# Altium PCB Timer.PcbDoc
Units mm, origin at the board's own origin, x right, y up, seen from the top; angles counter-clockwise.
Board outline 55 x 55 mm, 2 copper layers (Top Layer, Bottom Layer), stack 1.3 mm thick; 34 components, 43 nets, 113 pads, 22 vias.
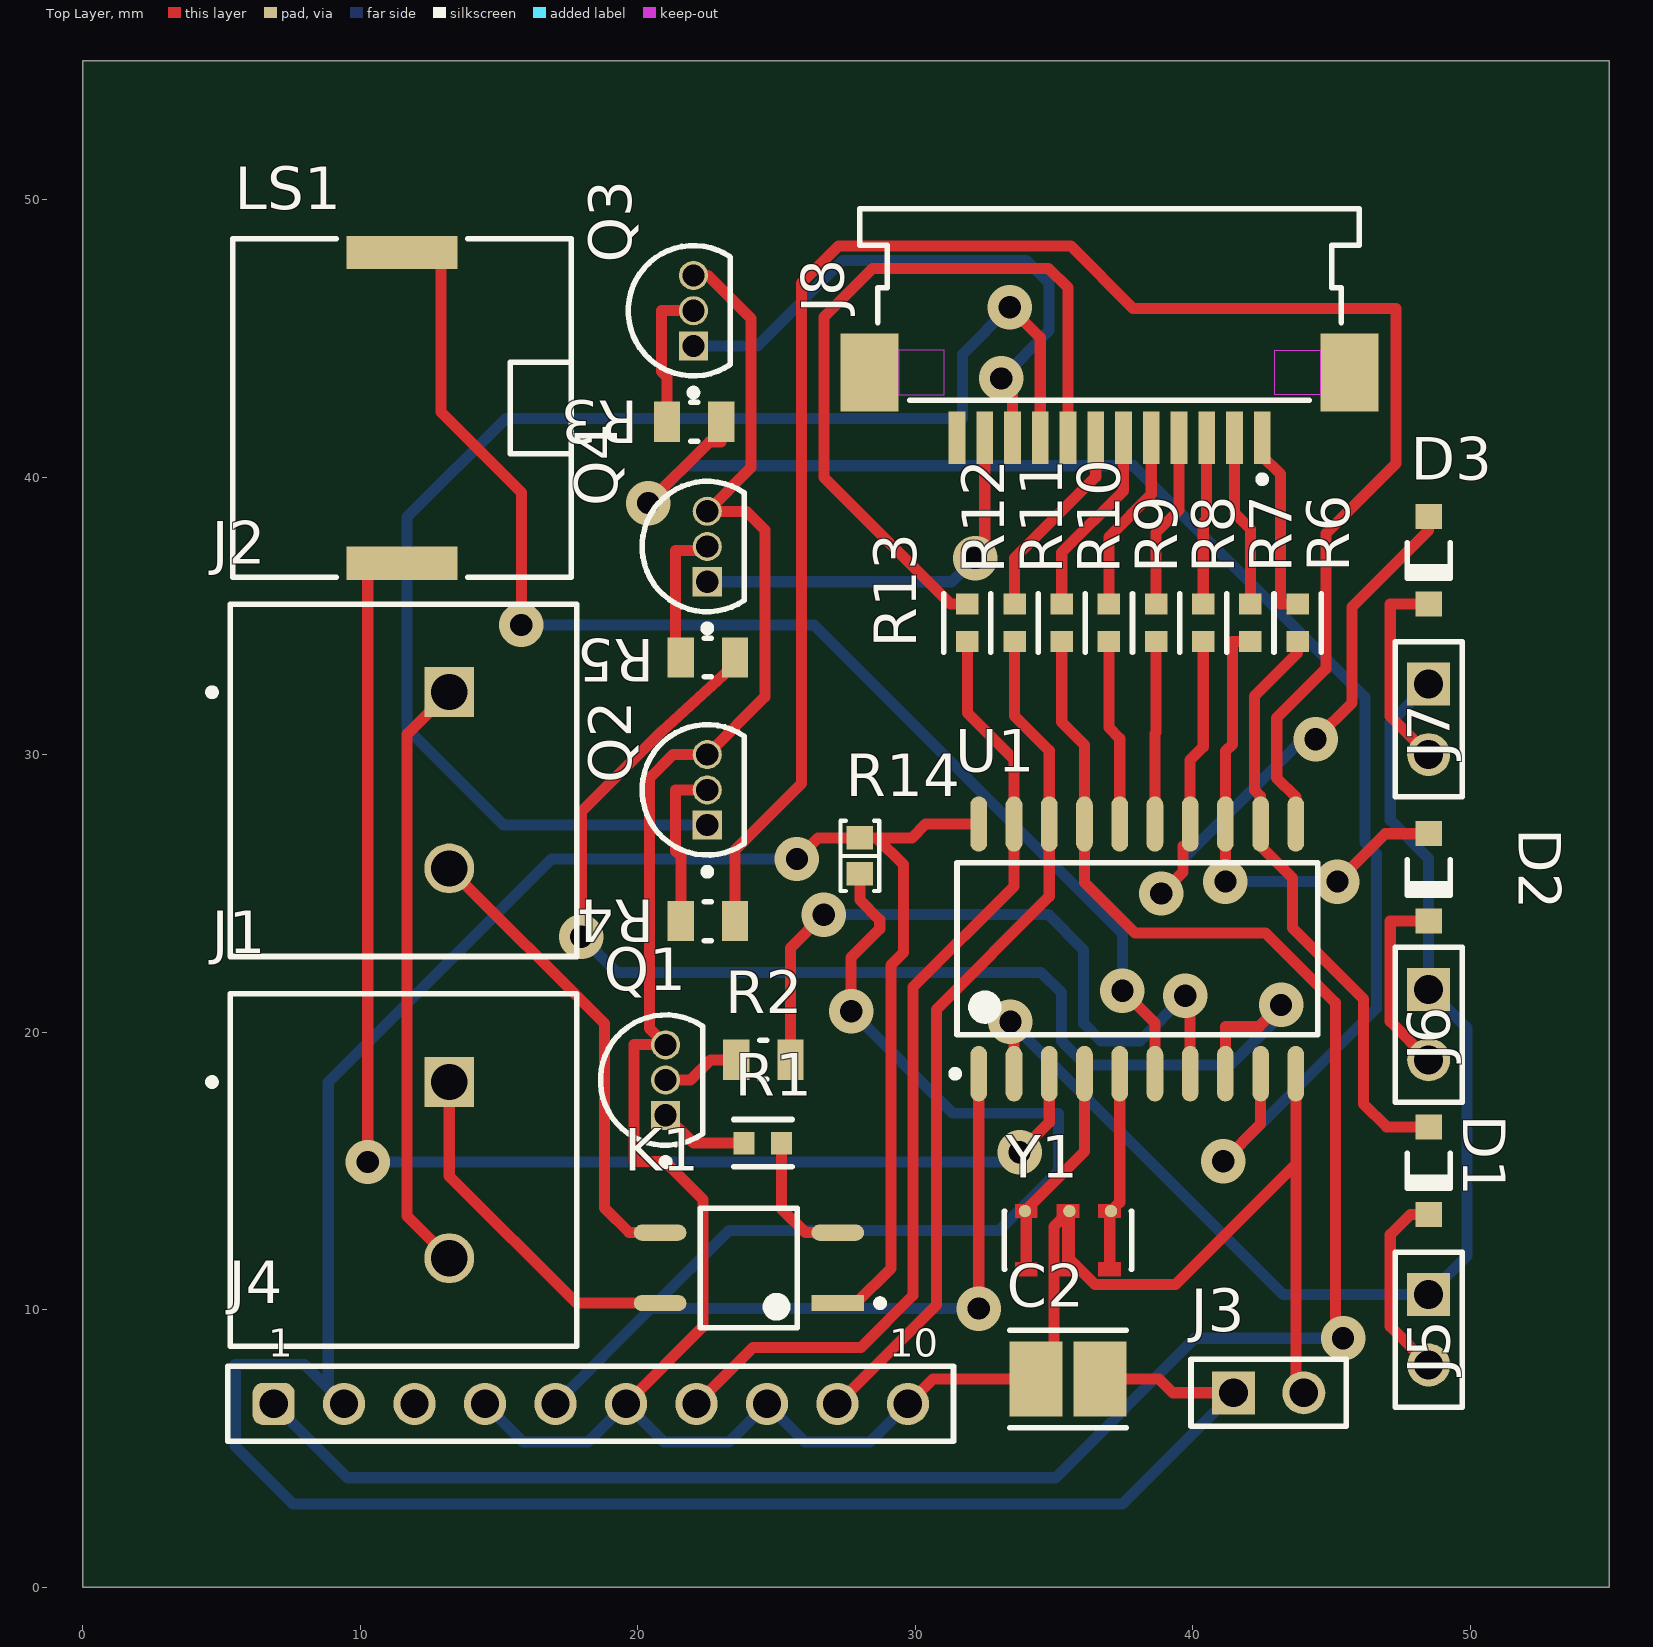
[diagram p0: Top Layer view]
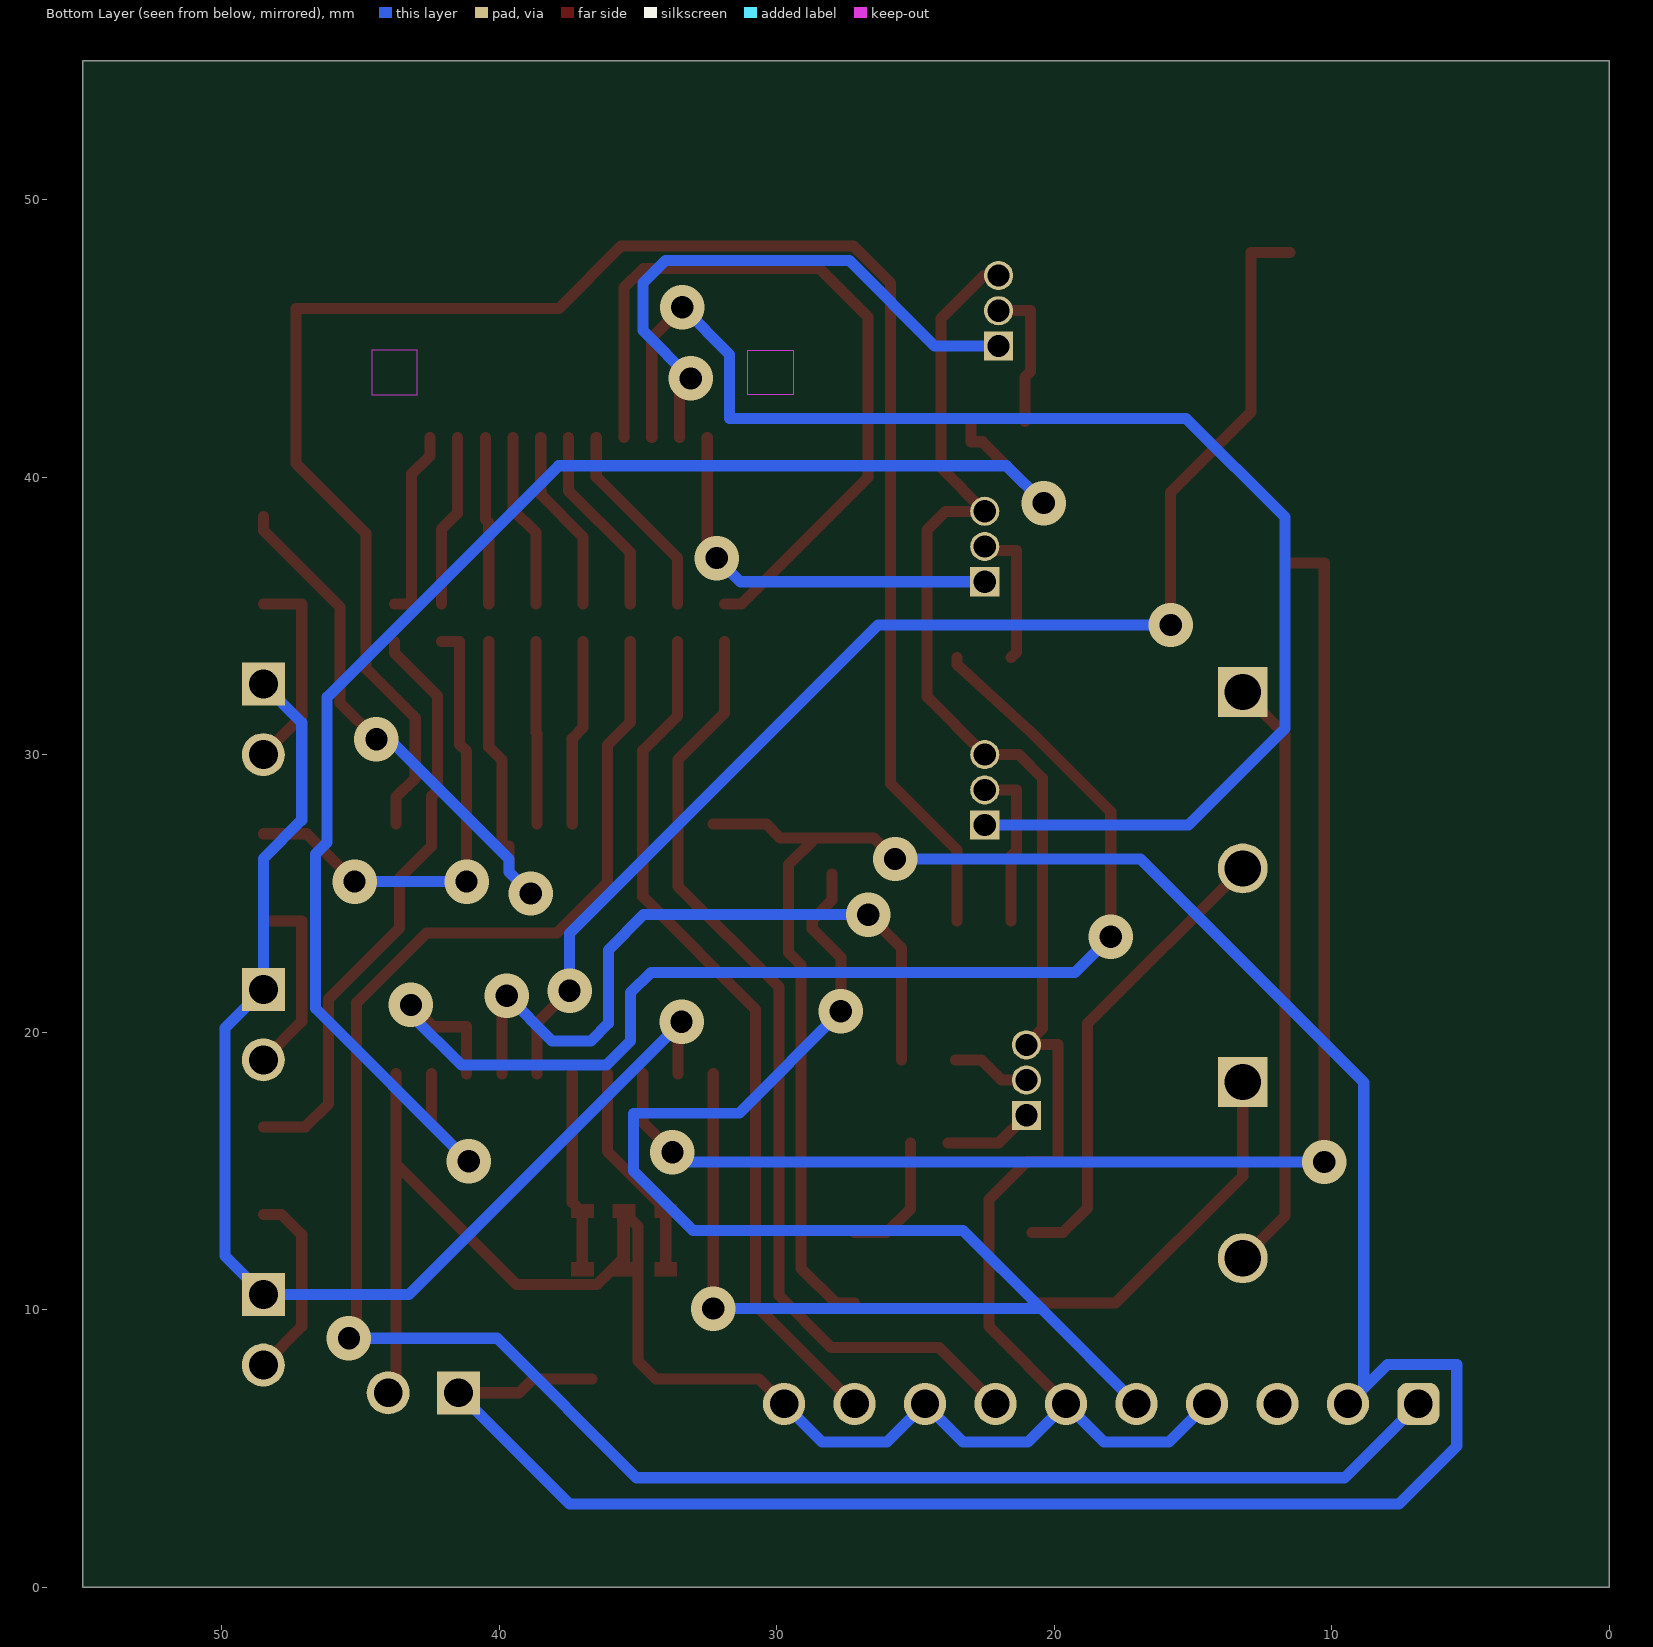
[diagram p1: Bottom Layer view, seen from below]
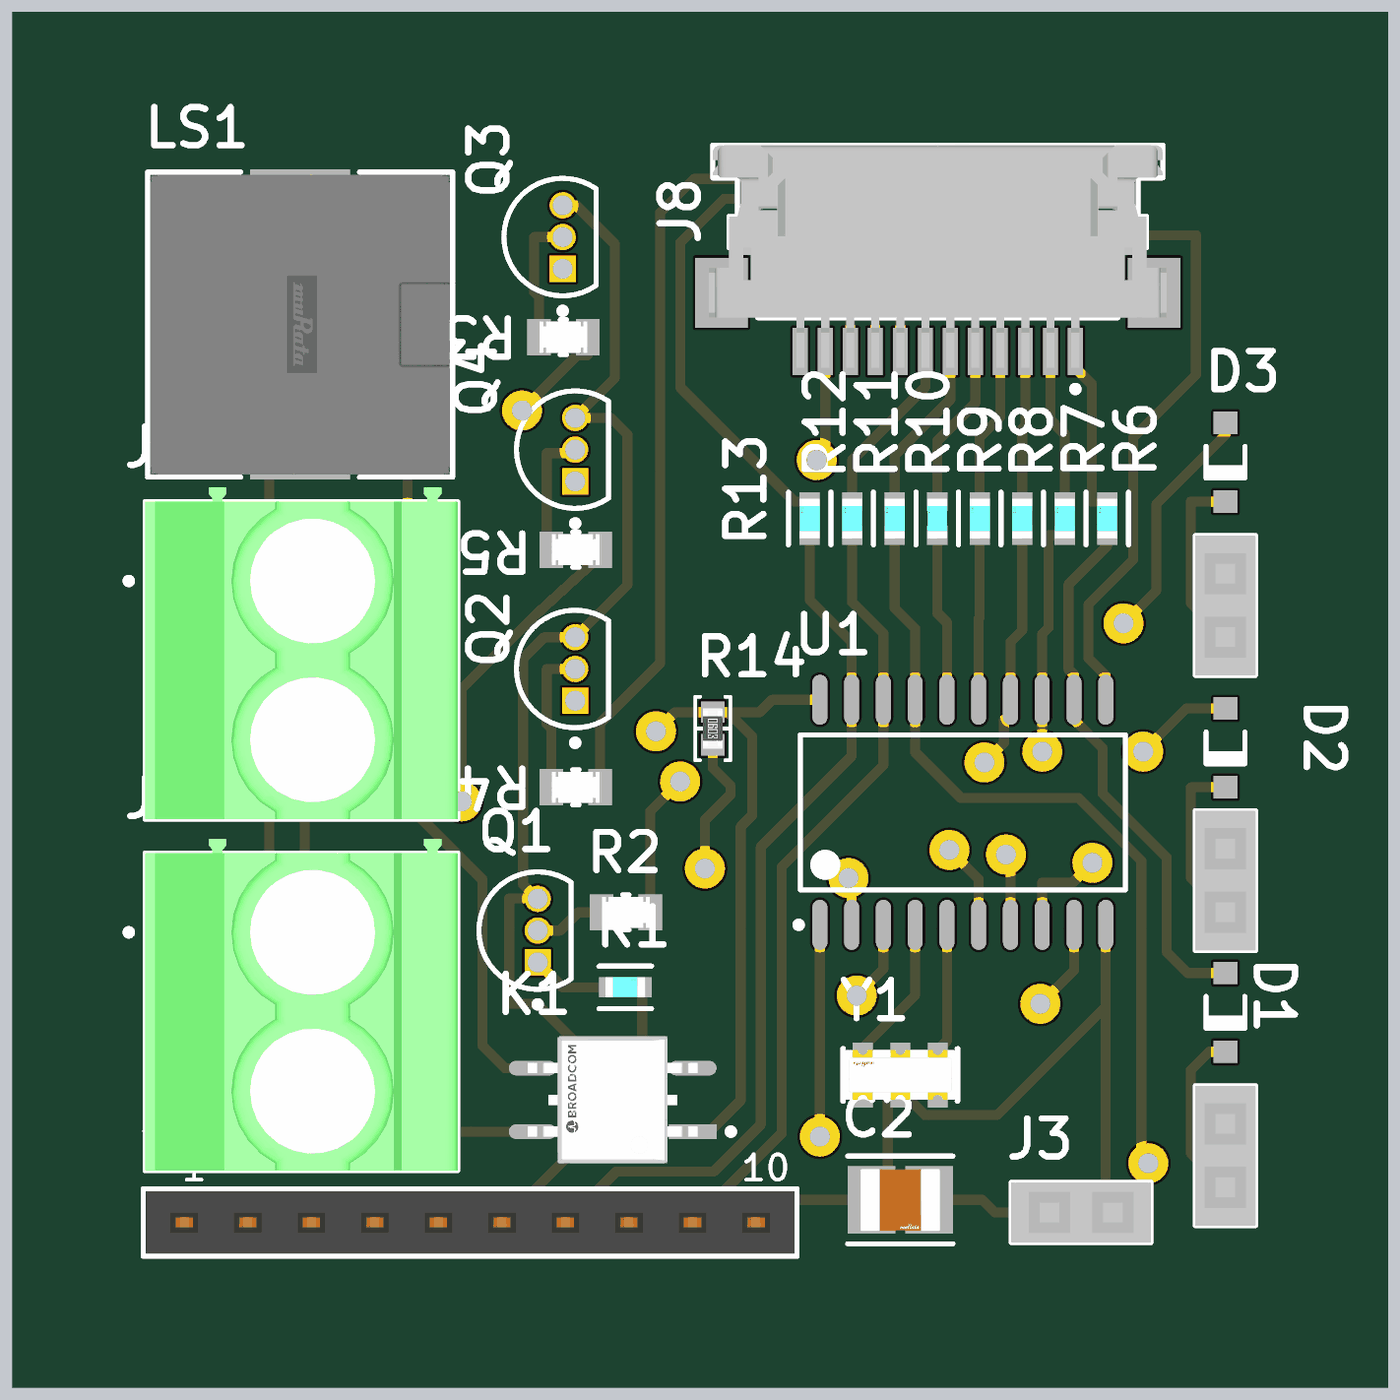
[diagram p2: 3D render of the assembled board from above, using the file's embedded part models]

## Layer stack, top to bottom
Top Solder: solder mask 0.05, Solder Resist, Dk 3.5
Top Layer: signal copper 0.05
Dielectric 1: dielectric 1.2, FR-4, Dk 4.8
Bottom Layer: signal copper 0.05
Bottom Solder: solder mask 0.05, Solder Resist, Dk 3.5

## Board outline
0,0 0,55 55,55 55,0

## Design rules (kind name [scope] priority, off if disabled: settings)
Clearance [All] p1: gap=0.1 ignorepadtopadclearanceinfootprint=FALSE
PolygonConnect [All] p1: connectstyle=Relief reliefconductorwidth=0.254 reliefentries=4 polygonreliefangle="90 Angle" airgapwidth=0.254
RoutingCorners [All] p1: cornerstyle=45-Degree minsetback=0.54 maxsetback=2.54
RoutingVias [All] p1: holewidth=0.8 width=1.6 viastyle="Through Hole" minholewidth=0.8 minwidth=1.6 maxholewidth=0.8 maxwidth=1.6
SolderMaskExpansion [All] p1: expansion=0.102 istentingtop=FALSE
Width [All] p1: maxlimit=0.4 minlimit=0.4 preferedwidth=0.4
29 further rules are at their usual default settings.

## Components (designator, comment, footprint, x,y, rotation, side; value= is the part's Value field where it differs from the comment)
C2 "GCM32ER71E106KA57K" FP-GCM32E-0_3-IPC_B 35.5,7.5 r0 top
D1 "1N4148W-7-F" DIOD-SOD123-2_V 48.5,15 r270 top
D2 "1N4148W-7-F" DIOD-SOD123-2_V 48.5,25.575 r270 top
D3 "1N4148W-7-F" DIOD-SOD123-2_V 48.5,37 r270 top
J1 "1714955" PHOE-1714955_V 13.2,15.025 r270 top
J2 "1714955" PHOE-1714955_V 13.2,29.075 r270 top
J3 "SSW-102-02-T-S" SMTC-SSW-102-02-X-S 41.46,7 r0 top
J4 "61301011821" 61301011821 18.3,6.6 r0 top
J5 "SSW-102-02-T-S" SMTC-SSW-102-02-X-S 48.5,10.54 r270 top
J6 "SSW-102-02-T-S" SMTC-SSW-102-02-X-S 48.5,21.54 r270 top
J7 "SSW-102-02-T-S" SMTC-SSW-102-02-X-S 48.5,32.54 r270 top
J8 "52207-1260" MOLX-52207-1260 37,42.6 r180 top
K1 "ASSR-4110-003E" FP-SO-4-IPC_A 24,11.5 r180 top value=0.4pF
LS1 "PKLCS1212E2000-R1" FP-PKLCS1212E2000-R1-MFG 11.5,42.5 r270 top
Q1 "BC547B" ONSC-TO-92-3-29-11 21,18.27 r90 top
Q2 "BC547B" ONSC-TO-92-3-29-11 22.5,28.73 r90 top
Q3 "BC547B" ONSC-TO-92-3-29-11 22,46 r90 top
Q4 "BC547B" ONSC-TO-92-3-29-11 22.5,37.5 r90 top
R1 "RK73H1JTTD1000F" FP-RK73H1J-IPC_C 24.5,16 r0 top value=100Ω
R2 "CRCW08056K80FKEA" FP-CRCW0805-e3-MFG 24.525,19 r0 top
R3 "CRCW08056K80FKEA" FP-CRCW0805-e3-MFG 22.025,42 r180 top
R4 "CRCW08056K80FKEA" FP-CRCW0805-e3-MFG 22.525,24 r180 top
R5 "CRCW08056K80FKEA" FP-CRCW0805-e3-MFG 22.525,33.5 r180 top
R6 "RK73H1JTTD1000F" FP-RK73H1J-IPC_C 43.775,34.75 r90 top value=100Ω
R7 "RK73H1JTTD1000F" FP-RK73H1J-IPC_C 42.075,34.75 r90 top value=100Ω
R8 "RK73H1JTTD1000F" FP-RK73H1J-IPC_C 40.375,34.75 r90 top value=100Ω
R9 "RK73H1JTTD1000F" FP-RK73H1J-IPC_C 38.675,34.75 r90 top value=100Ω
R10 "RK73H1JTTD1000F" FP-RK73H1J-IPC_C 36.975,34.75 r90 top value=100Ω
R11 "RK73H1JTTD1000F" FP-RK73H1J-IPC_C 35.275,34.75 r90 top value=100Ω
R12 "RK73H1JTTD1000F" FP-RK73H1J-IPC_C 33.575,34.75 r90 top value=100Ω
R13 "RK73H1JTTD1000F" FP-RK73H1J-IPC_C 31.875,34.75 r90 top value=100Ω
R14 "10 kOhms" "RES 0603_1608" 28,26.35 r270 top
U1 "ATtiny2313-20SU" 20S_L 38,23 r90 top
Y1 "CSTCR4M00G53-R0" FP-CSTCR4M00G53-R0-MFG 35.5,12.5 r180 top

## Footprints (in the part's own frame and the unit in brackets; to place one, negate y for a bottom-side part, rotate by r counter-clockwise, add the part's x,y. Pads: shape width x height; smd on the part's side, far side on the other; paste and mask are expansions set on the pad)
20S_L [mm] "SOIC, 20-Leads, Body 12.8x7.5mm, Pitch 1.27mm, IPC High Density"
  oval 2x0.6 smd: 1(-4.5,5.715) 2(-4.5,4.445) 3(-4.5,3.175) 4(-4.5,1.905) 5(-4.5,0.635) 6(-4.5,-0.635) 7(-4.5,-1.905) 8(-4.5,-3.175) 9(-4.5,-4.445) 10(-4.5,-5.715) 11(4.5,-5.715) 12(4.5,-4.445) 13(4.5,-3.175) 14(4.5,-1.905) 15(4.5,-0.635) 16(4.5,0.635) 17(4.5,1.905) 18(4.5,3.175) 19(4.5,4.445) 20(4.5,5.715)
  silkscreen extent -4.62,-6.5 3.1,6.69, body extent -3.8,-6.5 3.8,6.5, height 2.65
61301011821 [mm] "Socket Header, Pitch 2.54 mm, THT, Vertical, single row, 10p"
  rrect50% 1.52x1.52 hole 1.02: 1(-11.43,0)
  round 1.52 hole 1.02: 2(-8.89,0) 3(-6.35,0) 4(-3.81,0) 5(-1.27,0) 6(1.27,0) 7(3.81,0) 8(6.35,0) 9(8.89,0) 10(11.43,0)
  silkscreen extent -13.07,-1.35 13.07,1.35, body extent -12.95,-1.25 12.95,1.25, height 8.55
DIOD-SOD123-2_V [mm] "SOD123, 2-Leads, Body 2.7x1.55mm, Height 1.45mm"
  rect 0.9x0.95 smd: 1(-1.575,0) 2(1.575,0)
  silkscreen extent -0.64,-0.82 0.64,0.77, body extent -1.35,-0.77 1.35,0.77, height 1.45
FP-CRCW0805-e3-MFG [mm]
  rect 0.95x1.45 smd paste+0 mask+0: 1(-0.975,0) 2(0.975,0)
  silkscreen extent -0.12,-0.7 0.13,0.7, body extent -1.55,-0.82 1.55,0.82, height 0.25
FP-CSTCR4M00G53-R0-MFG [mm]
  round 0.45 smd paste+0 mask+0: 1(-1.55,-1.05) 2(-0.05,-1.05) 3(1.55,-1.05)
  Top Layer region: 1.1,1.3 1.9,1.3 1.9,0.8 1.7,0.8 1.7,-0.8 1.9,-0.8 1.9,-1.3 1.1,-1.3 1.1,-0.8 1.3,-0.8 1.3,0.8 1.1,0.8 1.1,1.3
  Top Layer region: -0.4,1.3 0.4,1.3 0.4,0.8 0.2,0.8 0.2,-0.8 0.4,-0.8 0.4,-1.3 -0.4,-1.3 -0.4,-0.8 -0.2,-0.8 -0.2,0.8 -0.4,0.8 -0.4,1.3
  Top Layer region: -1.9,1.3 -1.1,1.3 -1.1,0.8 -1.3,0.8 -1.3,-0.8 -1.1,-0.8 -1.1,-1.3 -1.9,-1.3 -1.9,-0.8 -1.7,-0.8 -1.7,0.8 -1.9,0.8 -1.9,1.3
  silkscreen extent -2.3,-1.05 2.3,1.05, body extent -2.4,-1.4 2.4,1.4, height 0.25
FP-GCM32E-0_3-IPC_B [mm]
  rect 1.903x2.706 smd paste+0 mask+0: 1(-1.151,0) 2(1.151,0)
  silkscreen extent -2.1,-1.75 2.1,1.75, body extent -2.35,-1.6 2.35,1.6, height 0.25
FP-PKLCS1212E2000-R1-MFG [mm]
  rect 1.2x4 smd paste+0 mask+0: 1(-5.6,0) 2(5.6,0)
  silkscreen extent -6.1,-6.1 6.1,6.1, body extent -6.3,-6.2 6.3,6.2, height 0.25
FP-RK73H1J-IPC_C [mm]
  rect 0.756x0.812 smd paste+0 mask+0: 1(-0.675,0) 2(0.675,0)
  silkscreen extent -1.05,-0.85 1.05,0.85, body extent -1.15,-0.55 1.15,0.55, height 0.25
FP-SO-4-IPC_A [mm]
  rect 1.903x0.581 smd paste+0 mask+0: 1(-3.2,1.27)
  rrect100% 1.903x0.581 smd paste+0 mask+0: 2(-3.2,-1.27) 3(3.2,-1.27) 4(3.2,1.27)
  silkscreen extent -4.85,-2.15 1.75,2.15, body extent -4.65,-2.65 4.65,2.65, height 0.25
MOLX-52207-1260 [mm] "FPC Connector, 12-Leads, Right Angle, Pitch 1.0 mm, Mated Height 2.7 mm, SMT"
  rect 0.6x1.9 smd: 1(-5.5,1.175) 2(-4.5,1.175) 3(-3.5,1.175) 4(-2.5,1.175) 5(-1.5,1.175) 6(-0.5,1.175) 7(0.5,1.175) 8(1.5,1.175) 9(2.5,1.175) 10(3.5,1.175) 11(4.5,1.175) 12(5.5,1.175)
  rect 2.1x2.8 smd: MP1(-8.65,-1.175) MP2(8.65,-1.175)
  Keep-Out Layer region: 7.6,-0.375 5.95,-0.375 5.95,-1.975 7.6,-1.975
  Keep-Out Layer region: -7.6,-0.375 -5.95,-0.375 -5.95,-1.975 -7.6,-1.975
  silkscreen extent -9,-7.07 9,2.8, body extent -9.15,-7.07 9.15,1.83, height 2.71
ONSC-TO-92-3-29-11 [mm] "TO, 3-Leads, Body Dia 4.7mm, Pitch 1.27mm"
  rect 1.05x1.05 hole 0.8: 1(-1.27,0)
  round 1.05 hole 0.8: 2(0,0) 3(1.27,0)
  silkscreen extent -3.07,-1.34 2.35,2.35, body extent -2.35,-1.33 2.36,2.36, height 7.87
PHOE-1714955_V [mm] "Terminal Block, 2-Leads, Body 12.7x12.5mm, Pitch 6.35mm"
  rect 1.8x1.8 hole 1.3: 1(-3.175,0)
  round 1.8 hole 1.3: 2(3.175,0)
  silkscreen extent -6.35,-8.67 6.35,4.6, body extent -6.92,-7.9 6.35,4.6, height 21.51
"RES 0603_1608" [mm] "Chip Resistor, 2-Leads, Body 1.60x0.80mm, IPC Medium Density"
  rect 0.85x0.95 smd: 1(-0.65,0) 2(0.65,0)
  silkscreen extent -1.27,-0.7 1.27,0.7, body extent -0.8,-0.4 0.8,0.4, height 0.45
SMTC-SSW-102-02-X-S [mm] "SQ Post Socket, 1x2 Pins, Vertical, 2.54mm Pitch, Female"
  rect 1.55x1.55 hole 1.04: 1(0,0)
  round 1.55 hole 1.04: 2(2.54,0)
  silkscreen extent -1.52,-1.2 4.07,1.21, body extent -1.52,-1.21 4.06,1.21, height 8.51

## Part data
C2: library part CMP-2000-06320-2, "Ceramic Capacitor for Automotive 10uF ±10% 25VDC X7R 1210 Embossed T/R", Capacitance=10uF, Case Code (Imperial)=1210, Case Code (Metric)=3225, Dielectric=X7R, Max Operating Temperature=125°C, Min Operating Temperature=-55°C, Package Quantity=4000, Ratings=AEC-Q200, Tolerance=10%, Voltage Rating=25V, Case/Package=1210, Depth=2.5mm, Height=2.5mm, Length=3.2mm, Mount="Surface Mount", Packaging="Tape and Reel", Radiation Hardening=No, Termination=SMD/SMT, Thickness=0.106inch, Voltage Rating (DC)=25V, Width=0.098inch
D1 D2 D3: library part CMP-2000-04932-2, "Fast Switching Diode, 100 V, 0.15 A, -65 to 150 degC, 2-Pin?SOD123, RoHS, Tape and Reel", If - Forward Current=0.15A, Ir - Reverse Current=1uA, Manufacturer=DiodesIncorporated, Max Surge Current=2A, Maximum Operating Temperature=+150C, Minimum Operating Temperature=-65C, Operating Temperature Range=-65Cto+150C, Package / Case=SOD-123, Package Reference=SOD123-2, Peak Reverse Voltage=100V, Vf - Forward Voltage=1.25V, Brand=DiodesIncorporated, Configuration=Single, Datasheet URL=http://www.farnell.com/datasheets/1915529.pdf, Datasheet Version="Rev. 24-2, 10/2013", Factory Pack Quantity=3000, Height=1.25mm, Length=2.85mm, Manufacturer URL=http://www.diodes.com/, Mounting Style=SMD/SMT, Package URL=http://www.diodes.com/datasheets/ds18004.pdf, Packaging=Reel, Product=SwitchingDiodes, Product Category=Diodes-GeneralPurpose,Power,Switching, Recovery Time=4ns, RoHS=True, Series=1N4148, Type=SwitchingDiode, Unit Weight=0.000353oz, Width=1.7mm
J1 J2: library part CMP-2000-05797-1, "PC Terminal Block, Pitch 6.35 mm, 1 x 2 Position, Height 21.5 mm, Tail Lenght 5.1 mm, RoHS, Bulk", Manufacturer="Phoenix Contact", Package Description="PC Terminal Block, Pitch 6.35 mm, 1 x 2 Position, Height 21.5 mm, Tail Lenght 5.1 mm", Datasheet URL=http://media.digikey.com/pdf/Data%20Sheets/Phoenix%20Contact%20PDFs/1714955.pdf, Datasheet Version=02/2010, Manufacturer URL=http://www.phoenixcontact.com/, Mounting Technology=ThroughHole, Package Reference=1714955
J3 J5 J6 J7: library part CMP-1023-00323-1, "SQ Post Socket, Through-hole, Vertical, -55 to 105 degC, 2.54 mm Pitch, 2-Pin, Female, RoHS", Manufacturer=Samtec, Temperature Range="-55 to 105 degC", ComponentLink1Description="Manufacturer URL", ComponentLink1URL=http://www.samtec.com, ComponentLink2Description=Datasheet, ComponentLink2URL=http://www.samtec.com/documents/webfiles/pdf/SSW_TH.PDF, ComponentLink3Description="Package Specification", ComponentLink3URL=http://www.samtec.com/documents/webfiles/cpdf/SSW-1XX-XX-XXX-X-XX-XXX-XX-MKT.pdf, DatasheetVersion=F-214, Mounting Technology=Through-hole, Orientation=Vertical, PackageDescription="Assembly, Socket Strip .016 X .031 Tail", PackageReference=SSW-102-02-X-S, PackageVersion="CA, 6/1987", PartNumber=SSW-102-02-T-S, Pitch="2.54 mm", RoHS=True
J4: library part CMP-1502-01332-2, Color=Black, Contact Resistance=20mΩ, Current Rating=3A, Flammability Rating="UL94 V-0", Insulation Resistance=1GΩ, Max Operating Temperature=125°C, Min Operating Temperature=-40°C, Operating Supply Voltage=250V, Connector Type="Header, Socket", Contact Gender=Female, Contact Material=Copper, Contact Plating=Gold, Gender=Female, Height=8.5mm, Housing Material=PBT, Insulation=Insulated, Lead Free="Lead Free", Lead Pitch=2.54mm, Length=25.9mm, Mount="Through Hole", NexarPartId=18818160, Number of Contacts=10, Number of Pins=10, Number of Positions=10, Number of Rows=1, Orientation=Vertical, Pitch=2.54mm, REACH SVHC=Unknown, RoHS=Compliant, Termination="Through Hole", Voltage Rating=250V, Width=25.9mm
J8: library part CMP-1241-00187-1, "1.0 mm Pitch Easy-On(TM) Type FPC Connector, 2.7 mm Mated Height, Right Angle, ZIF, SMT, Top Contact, 12 Circuits, -30 to 85 degC, ELV and RoHS Compliant, Tape and Reel", Current (Max per Contact)=1A, Manufacturer=Molex, Voltage (Max)=125V, Circuits (Loaded)=12, ComponentLink1Description="Manufacturer URL", ComponentLink1URL=http://www.molex.com/molex/index.jsp, ComponentLink2Description=Datasheet, ComponentLink2URL=http://www.molex.com/webdocs/datasheets/pdf/en-us/0522071260_FFC_FPC_CONNECTORS.pdf, ComponentLink3Description="Package Specification", ComponentLink3URL=http://www.molex.com/pdm_docs/sd/522071260_sd.pdf, Contact Position=Top, Durability (mating cycles max)=30, Entry Angle="90degrees Angle", Mated Height=2.70mm, Material - Metal="Phosphor Bronze", Material - Plating Mating=Gold, Material - Plating Termination=Tin, Mounting Technology="Surface Mount", Number of Rows=1, Orientation="Right Angle", PackageDescription="12-Lead FPC Connector, Pitch 1.0 mm", PackageReference=52207-1260, PackageVersion="Rev. F, 03/2007", Packing="Tape and Reel", PartNumber=52207-1260, PCB Locator=No, PCB Retention=Yes, Pitch - Mating Interface=1.00mm, Pitch - Termination Interface=1.00mm, Polarized to PCB=Yes, RoHS=TRUE, Stackable=No
K1: library part CMP-18473-000004-1, "SSR RELAY SPST-NO 120MA 0-400V", Ambient Temperature Range High=+85°C, Ambient Temperature Range Low=-40°C, Capacitance=0.4pF, Input Current=20mA, Isolation Voltage=3750Vrms, Manufacturer=Broadcom, Max Junction Temp=+125°C, Max Surge Forward Current=50mA, On State Resistance=16Ω, Output Current=0.12A, Output Voltage=400V, Package=SO-4, Temperature="to +125°C", Automotive=No, Category=Relay, ComponentLink2Description=Datasheet, ComponentLink2URL=https://docs.broadcom.com/docs/AV02-0279EN, Device Class L1=Electromechanical, Device Class L2=Relays, Device Class L3="Solid State Relays", Digikey Description="SSR RELAY SPST-NO 120MA 0-400V", Height=2.404mm, Ipc Land Pattern Name=SOIC254P680X210-4, Lead Free=Yes, Manufacturer Part Number=ASSR-4110-003E, Mouser Description="Solid State Relays - PCB Mount SSR(GP+1A) (400V 0.1A)", Number of Contacts=1, Octopart=https://octopart.com/assr-4110-003e-broadcom-71127410, RoHS=TRUE, Standoff Height=0mm, Temperature Range High=+125°C, Throw Configuration=SPST-NO
LS1: library part CMP-06202-000001-1, "AUDIO PIEZO TRANSDUCER 12.5V SMD", Frequency=2kHz, Manufacturer=Murata, Operating Supply Voltage=12.5V, Temperature="-20°C to +70°C", Temperature Range High=+70°C, Temperature Range Low=-20°C, Automotive=No, Category=Speak, ComponentLink2Description=Datasheet, ComponentLink2URL=https://www.murata.com/en-global/products/productdata/8801054425118/SPEC-PKLCS1212E2000-R1.pdf?1517839212000, Device Class L1=Electromechanical, Device Class L2="Audio Products", Device Class L3=Buzzers, Digikey Description="AUDIO PIEZO TRANSDUCER 12.5V SMD", Height=3mm, Lead Free=Yes, Manufacturer Part Number=PKLCS1212E2000-R1, Mouser Description="Piezo buzzer SMD [] Murata PKLCS1212E2000R1 (Piezo buzzer SMD Signal Generators for PCBs).", Octopart=https://octopart.com/pklcs1212e2000-r1-murata-7123179, Package=PKLCS1212E2000-R1, RoHS=TRUE
Q1 Q2 Q3 Q4: library part CMP-1048-01467-1, "Amplifier Transistor, NPN Silicon, 3-Pin TO-92, Bulk Box", Manufacturer="On Semiconductor", ComponentLink1Description="Manufacturer URL", ComponentLink1URL=http://www.onsemi.com/, ComponentLink2Description=Datasheet, ComponentLink2URL=http://www.onsemi.com/pub_link/Collateral/BC546-D.PDF, ComponentLink3Description="Package Specification", ComponentLink3URL=http://www.onsemi.cn/pub_link/Collateral/2N6426-D.PDF, DatasheetVersion="Rev. 7", fT Min (MHz)=150, IC Continuous (A)=0.1, Mounting Technology="Through Hole", PackageDescription="3-Pin Transistor Outline, Body 4.825 x 3.685 mm, Pitch 1.27 mm", PackageReference=TO-92-3-29-11_AM_SL, PackageVersion="Rev. AM", Packing="Bulk Box", PartNumber=BC547B, Polarity=NPN, RoHS=FALSE
R1 R6 R7 R8 R9 R10 R11 R12 R13: library part CMP-2000-01097-2, "RES 100 OHM 1% 1/8W 0603", Approved Alternate Part Number=541-1.00HHCT-ND, Manufacturer="KOA Speer", Package=RK73H1J, Power=100mW, Power Rating=0.1W, Resistance=100Ω, Temperature="-55°C to +155°C", Temperature Coefficient=100ppm/°C, Temperature Range High=+155°C, Temperature Range Low=-55°C, Tolerance=1%, Voltage=75V, Automotive=Yes, Automotive Grade="Grade 0", Category=Res, ComponentLink2Description=Datasheet, ComponentLink2URL=http://www.koaspeer.com/pdfs/RK73H.pdf, Composition="Thick Film", Device Class L1="Passive Components", Device Class L2=Resistors, Device Class L3="Chip SMD Resistors", Digikey Description="RES 100 OHM 1% 1/8W 0603", Footprint Url=http://www.koaspeer.com/pdfs/Appendix_E.pdf, Height=0.5mm, Ipc Land Pattern Name=RESC16080X45, Lead Free=Yes, Manufacturer Part Number=RK73H1JTTD1000F, Mouser Description="Thick Film Resistors - SMD 1/10watts 100ohms 1%", Octopart=https://octopart.com/rk73h1jttd1000f-koa+speer-2165025, RoHS=TRUE, Series=RK73H, Standoff Height=0mm, Voltage Rating=75V
R2 R3 R4 R5: library part CMP-2001-04088-2, "RES Thick Film, 6.8kΩ, 1%, 0.125W, 100ppm/°C, 0805", Case Code (Imperial)=0805, Case Code (Metric)=2012, Max Operating Temperature=155°C, Max Power Dissipation=125mW, Min Operating Temperature=-55°C, Package Quantity=10, Resistance=6.8kR, Temperature Coefficient=100ppm/°C, Tolerance=1%, Voltage Rating=150V, Case/Package=0805, Composition="Thick Film", Contact Plating=Tin, Depth=1.25mm, Features="Automotive AEC-Q200", Height=0.45mm, Lead Free="Lead Free", Length=2mm, Military Standard=Not, Mount="Surface Mount", Number of Terminations=2, Packaging="Tape and Reel", Power Rating=125mW, Radiation Hardening=No, Termination=SMD/SMT, Voltage Rating (DC)=150V, Weight=0.000194oz, Width=0.049inch
R14: library part RCS060310K0JNEA, "RES SMD 10K OHM 5% 1/4W 0603", Device Package="0603 (1608 Metric)", Manufacturer="Vishay Dale", Operating Temperature="-55°C ~ 155°C", Power (Watts)="0.25W, 1/4W", Ratings=AEC-Q200, Supplier Device Package=0603, Supplier Part Number 1=541-2817-1-ND, Temperature Coefficient=±200ppm/°C, Tolerance=±5%, ComponentLink1Description=Datasheet, ComponentLink1URL=http://www.vishay.com/docs/20065/rcse3.pdf, ComponentLink2Description="DigiKey Link", ComponentLink2URL=https://www.digikey.com/en/products/detail/vishay-dale/RCS060310K0JNEA/5866963, Composition="Thick Film", Features="Automotive AEC-Q200, Pulse Withstanding", Height - Seated (Max)="0.020\" (0.50mm)", LastUpdated="09.02.2024 20:43:35", Lifecycle Status=Active, Minimum Order=1, Number of Terminations=2, Package / Case="0603 (1608 Metric)", Packaging=TapeAndReel, Part Number=RCS060310K0JNEA, Part Status=Active, PartId=5383, Price=0.01, Resistance="10 kOhms", Series="RCS e3", Size / Dimension="0.061\" L x 0.033\" W (1.55mm x 0.85mm)", Supplier 1=DigiKey
U1: library part CMP-0093-00143-2, "Low Power tinyAVR® 8-Bit Microcontroller, 2.7-5.5V, 20MHz, 2K Flash Memory, Industrial Grade (-40°C to 85°C), 20-Lead SOIC, Pb-Free", Code_IPC=SOIC127P1030-20, Code_JEDEC=MS-013-AC, ComponentLink1Description="Manufacturer URL", ComponentLink1URL=http://www.atmel.com/, ComponentLink2Description="ATtiny2313 Datasheet", ComponentLink2URL=http://www.atmel.com/dyn/resources/prod_documents/doc2543.pdf, ComponentLink3Description="ATtiny2313 Summary", ComponentLink3URL=http://www.atmel.com/dyn/resources/prod_documents/doc2543S.pdf, DatasheetVersion="revL, Aug-2010", PackageDescription="20-lead, 0.300\" Wide Body, Plastic Gull Wing Small Outline Package (SOIC)", PackageReference=20S, PackageVersion="revB, Nov-2006", RevisionNote="DatasheetVersion & PackageVersion updated. URLs added."
Y1: library part CMP-06057-000010-1, "CERAMIC RES 4.0000MHZ 15PF SMD", Capacitance=15pF, Case/Package=SMD/SMT, Dielectric Material=Ceramic, Frequency=4MHz, Frequency Stability=0.2%, Frequency Tolerance=0.5%, Max Operating Temperature=80°C, Min Operating Temperature=-20°C, Package Quantity=3000, Voltage Rating (DC)=6V, Contact Plating=Gold, Height=0.047inch, Impedance=60R, Lead Free="Lead Free", Length=4.5mm, Load Capacitance=15pF, Mount="Surface Mount", Number of Pins=3, Packaging="Tape and Reel", REACH SVHC="No SVHC", Resistor Type=Ceramic, Self Resonant Frequency=4MHz, Termination=SMD/SMT, Tolerance=0.5%, Width=2mm

## Via types
v1: diameter 1.6, hole 0.8, Top Layer to Bottom Layer, 22 vias

## Nets (pads, with @x,y where several pads share a name; then routed paths per layer and width w, separated by ;. In a path a pad name is that pad's centre, name@x,y a point inside that pad or via, vN(x,y) a via of type N, cw(c..) or ccw(c..) an arc to the next point about the centre after c; other vN are vias at no path point)
GND: C2.1 J3.2 J4.4 J4.6 J4.8 J4.10 Q1.3 Q2.3 Q3.3 Q4.3 U1.10 Y1.2 | length 104.8
  Top Layer w0.4: J4.6 22.352,9.382 22.352,13.97 20.98,15.342 19.863,15.342 19.863,19.558 Q1.3@20.991,19.549 ; Q1.3 Q1.3@20.991,19.549 ; Q3.3 22.529,47.27 24.079,45.72 24.079,40.349 Q4.3 23.917,38.77 24.587,38.1 24.587,32.087 Q2.3 21.262,30 20.411,29.149 20.411,20.129 Q1.3@20.991,19.549 ; J4.10 30.63,7.5 C2.1 35,8.151 35,13 Y1.2 35.55,11.826 36.476,10.9 39.375,10.9 43.715,15.24 ; U1.10 43.715,15.24 ; J3.2 43.936,6.997 43.832,7.1 43.715,7.217 43.715,15.24
  Bottom Layer w0.4: J4.4 15.858,5.232 18.202,5.232 J4.6 20.938,5.232 23.282,5.232 J4.8 26.018,5.232 28.362,5.232 J4.10
NetC2_2: C2.2 J3.1 J4.2 K1.1 R14.1 U1.20 | length 107.8
  Top Layer w0.4: v1(25.73,26.238) 26.492,27 R14.1 28.608,27 ; K1.1 27.861,10.23 29.117,11.485 29.117,22.418 29.573,22.874 29.573,26.035 28.608,27 ; U1.20 30.37,27.5 29.87,27 28.608,27 ; C2.2 38.786,7.5 39.286,7 J3.1
  Bottom Layer w0.4: J4.2 8.839,7.171 ; v1(25.73,26.238) 16.891,26.238 8.839,18.186 8.839,7.171 ; J3.1 37.457,2.997 7.569,2.997 5.486,5.08 5.486,8.026 7.984,8.026 8.839,7.171
NetD1_1: D1.1 R6.1 U1.12 | length 21.6
  Top Layer w0.4: R6.1 43.775,33.656 42.225,32.106 42.225,28.719 42.445,28.499 U1.12 42.445,26.698 43.586,25.557 43.586,23.751 46.152,21.185 46.152,17.413 46.99,16.575 D1.1
NetD1_2: D1.2 J5.2 | length 7
  Top Layer w0.4: J5.2 47.117,9.383 47.117,12.7 47.842,13.425 D1.2
NetD2_1: D2.1 R7.1 U1.13 | length 17.4
  Top Layer w0.4: v1(41.175,25.425) U1.13 41.175,30.124 41.425,30.374 41.425,34.074 R7.1 ; v1(45.212,25.425) 46.937,27.15 D2.1
  Bottom Layer w0.4: v1(41.175,25.425) v1(45.212,25.425)
NetD2_2: D2.2 J6.2 | length 7
  Top Layer w0.4: J6.2 47.117,20.383 47.117,24 D2.2
NetD3_1: D3.1 R8.1 U1.14 | length 27.7
  Top Layer w0.4: v1(38.862,24.994) 39.645,25.777 39.645,26.7 39.905,26.7 U1.14 39.905,29.807 40.375,30.277 R8.1 ; v1(44.425,30.556) 45.737,31.869 45.737,35.323 48.5,38.086 D3.1
  Bottom Layer w0.4: v1(38.862,24.994) 39.645,25.777 39.645,26.231 43.97,30.556 v1(44.425,30.556)
NetD3_2: D3.2 J7.2 | length 7.4
  Top Layer w0.4: J7.2 47.117,31.383 47.117,35.425 D3.2
NetJ1_1: J1.1 K1.4 | length 12.9
  Top Layer w0.4: J1.1 13.2,14.81 17.78,10.23 K1.4
NetJ1_2: J1.2 J2.1 | length 21.7
  Top Layer w0.4: J1.2 11.684,13.366 11.684,30.734 J2.1
NetJ2_2: J2.2 K1.3 | length 16.9
  Top Layer w0.4: J2.2 18.796,20.304 18.796,13.662 19.688,12.77 K1.3
NetJ4_1: J4.1 R11.1 U1.17 | length 73.8
  Top Layer w0.4: R11.1 35.275,31.173 36.095,30.353 U1.17 36.095,25.4 37.924,23.571 42.621,23.571 45.136,21.057 45.136,9.246 v1(45.415,8.966)
  Bottom Layer w0.4: J4.1 9.533,3.937 35.052,3.937 40.081,8.966 v1(45.415,8.966)
NetJ4_5: J4.5 R14.2 U1.1 | length 58.6
  Top Layer w0.4: v1(27.686,20.752) 27.686,22.686 28.716,23.716 28.716,24.048 28,24.764 R14.2 ; v1(32.285,10.033) U1.1
  Bottom Layer w0.4: J4.5 20.463,10.033 ; v1(27.686,20.752) 31.347,17.091 35.157,17.069 35.157,14.992 33.02,12.855 23.285,12.855 20.463,10.033 ; v1(32.285,10.033) 20.463,10.033
NetJ4_7: J4.7 R13.1 U1.19 | length 35.2
  Top Layer w0.4: J4.7 24.146,8.636 28.042,8.636 29.921,10.516 29.921,21.618 33.555,25.252 U1.19 33.555,29.82 31.875,31.5 R13.1
NetJ4_9: J4.9 R12.1 U1.18 | length 31.2
  Top Layer w0.4: J4.9 30.759,10.169 30.759,20.818 34.825,24.883 U1.18 34.825,30.15 33.575,31.4 R12.1
NetJ5_1: J5.1 J6.1 J7.1 U1.2 | length 45.4
  Top Layer w0.4: v1(33.426,20.371) 33.555,20.242 U1.2
  Bottom Layer w0.4: v1(33.426,20.371) 43.257,10.54 J5.1 49.886,11.926 49.886,20.154 J6.1 48.5,26.252 47.117,27.635 47.117,31.157 J7.1
NetJ8_1: J8.1 R6.2 | length 6.9
  Top Layer w0.4: J8.1 42.5,40.767 43.155,40.112 43.155,35.425 R6.2
NetJ8_2: J8.2 R7.2 | length 6.2
  Top Layer w0.4: J8.2 41.5,38.7 42.075,38.125 R7.2
NetJ8_3: J8.3 R8.2 | length 6.1
  Top Layer w0.4: R8.2 40.375,38.354 40.5,38.479 J8.3
NetJ8_4: J8.4 R9.2 | length 6.3
  Top Layer w0.4: R9.2 38.675,37.998 39.5,38.823 J8.4
NetJ8_5: J8.5 R10.2 | length 6.6
  Top Layer w0.4: R10.2 36.975,37.845 38.5,39.37 J8.5
NetJ8_6: J8.6 R11.2 | length 6.9
  Top Layer w0.4: R11.2 35.275,37.282 37.5,39.507 J8.6
NetJ8_7: J8.7 R12.2 | length 7.2
  Top Layer w0.4: R12.2 33.575,37.08 36.5,40.005 J8.7
NetJ8_8: J8.8 R13.2 | length 28.1
  Top Layer w0.4: R13.2 31.271,35.425 26.7,39.996 26.7,45.775 28.451,47.526 34.801,47.526 35.5,46.827 J8.8
NetJ8_9: J8.9 Q2.1 | length 51.2
  Top Layer w0.4: v1(33.401,46.126) 34.5,45.027 J8.9
  Bottom Layer w0.4: Q2.1 15.161,27.46 11.684,30.937 11.684,38.557 15.24,42.113 31.695,42.113 31.695,44.42 v1(33.401,46.126)
NetJ8_10: J8.10 Q3.1 | length 20.9
  Top Layer w0.4: v1(33.096,43.561) 33.5,43.157 J8.10
  Bottom Layer w0.4: Q3.1 24.308,44.73 27.381,47.803 34.011,47.803 34.823,46.99 34.823,45.288 v1(33.096,43.561)
NetJ8_11: J8.11 Q4.1 | length 14.5
  Top Layer w0.4: v1(32.156,37.084) 32.5,37.428 J8.11
  Bottom Layer w0.4: Q4.1 31.302,36.23 v1(32.156,37.084)
NetK1_2: K1.2 R1.2 | length 4.8
  Top Layer w0.4: R1.2 25.175,13.63 26.035,12.77 K1.2
NetLS1_1: LS1.1 U1.6 | length 47.8
  Top Layer w0.4: LS1.1 12.903,48.1 12.903,42.342 15.799,39.446 v1(15.799,34.671) ; v1(37.462,21.493) 38.635,20.32 U1.6
  Bottom Layer w0.4: v1(15.799,34.671) 26.34,34.671 37.462,23.549 v1(37.462,21.493)
NetLS1_2: LS1.2 U1.3 | length 49.9
  Top Layer w0.4: v1(10.262,15.316) 10.262,36.9 LS1.2 ; v1(33.757,15.672) 34.825,16.74 U1.3
  Bottom Layer w0.4: v1(10.262,15.316) 33.757,15.316 v1(33.757,15.672)
NetQ1_1: Q1.1 R1.1 | length 3.2
  Top Layer w0.4: Q1.1 22,16 R1.1
NetQ1_2: Q1.2 R2.1 | length 2.9
  Top Layer w0.4: Q1.2 21.895,18.27 22.625,19 R2.1
NetQ2_2: Q2.2 R4.2 | length 5.9
  Top Layer w0.4: R4.2 21.55,26.34 21.361,26.528 21.361,28.73 Q2.2
NetQ3_2: Q3.2 R3.2 | length 5.2
  Top Layer w0.4: R3.2 21.05,43.612 20.853,43.808 20.853,46 Q3.2
NetQ4_2: Q4.2 R5.2 | length 5.2
  Top Layer w0.4: R5.2 21.361,33.689 21.361,37.363 22.5,37.363 Q4.2
NetR2_2: R2.2 U1.7 | length 25.7
  Top Layer w0.4: R2.2 25.5,23.036 v1(26.695,24.232) ; v1(39.726,21.311) 39.905,21.131 U1.7
  Bottom Layer w0.4: v1(26.695,24.232) 34.792,24.232 36.062,22.962 36.062,20.32 36.697,19.685 38.1,19.685 v1(39.726,21.311)
NetR3_1: R3.1 U1.9 | length 57
  Top Layer w0.4: v1(20.371,39.065) 22.581,41.275 23,41.275 R3.1 ; v1(41.097,15.342) 42.445,16.689 U1.9
  Bottom Layer w0.4: v1(20.371,39.065) 21.717,40.412 37.859,40.412 46.203,32.068 46.203,26.835 46.615,26.423 46.615,20.859 v1(41.097,15.342)
NetR4_1: R4.1 U1.11 | length 67.5
  Top Layer w0.4: R4.1 23.5,26.568 25.9,28.968 25.9,46.99 27.236,48.326 35.601,48.326 37.852,46.076 47.32,46.076 47.32,40.488 44.806,37.973 44.806,33.096 43.025,31.315 43.025,29.156 43.715,28.466 U1.11
NetR5_1: R5.1 U1.8 | length 45.7
  Top Layer w0.4: v1(17.958,23.437) 17.958,27.94 20.853,30.836 23.5,33.249 R5.1 ; U1.8 41.175,20.193 42.393,20.193 v1(43.18,20.98)
  Bottom Layer w0.4: v1(17.958,23.437) 19.243,22.152 34.528,22.152 35.262,21.418 35.262,19.685 36.138,18.809 41.364,18.809 43.18,20.625 v1(43.18,20.98)
NetR9_1: R9.1 U1.15 | length 6.6
  Top Layer w0.4: U1.15 38.635,30.759 38.675,30.799 R9.1
NetR10_1: R10.1 U1.16 | length 6.7
  Top Layer w0.4: R10.1 36.975,30.972 37.365,30.582 U1.16
NetU1_4: U1.4 Y1.3 | length 5.8
  Top Layer w0.4: Y1.3 36.095,15.695 U1.4
NetU1_5: U1.5 Y1.1 | length 5.1
  Top Layer w0.4: Y1.1 37.365,13.865 U1.5
pads on no net: J4.3 J8.12 J8.MP1 J8.MP2

## Text inside footprints (layer, text, board x,y; h text height)
J4: Top Overlay "10" at 29.05,8.3 h1.02; Top Overlay "1" at 6.68,8.3 h1.02